# EAGLE board Teensy-MicroMod-Panel (EAGLE 9.5.2), part 1 of 10
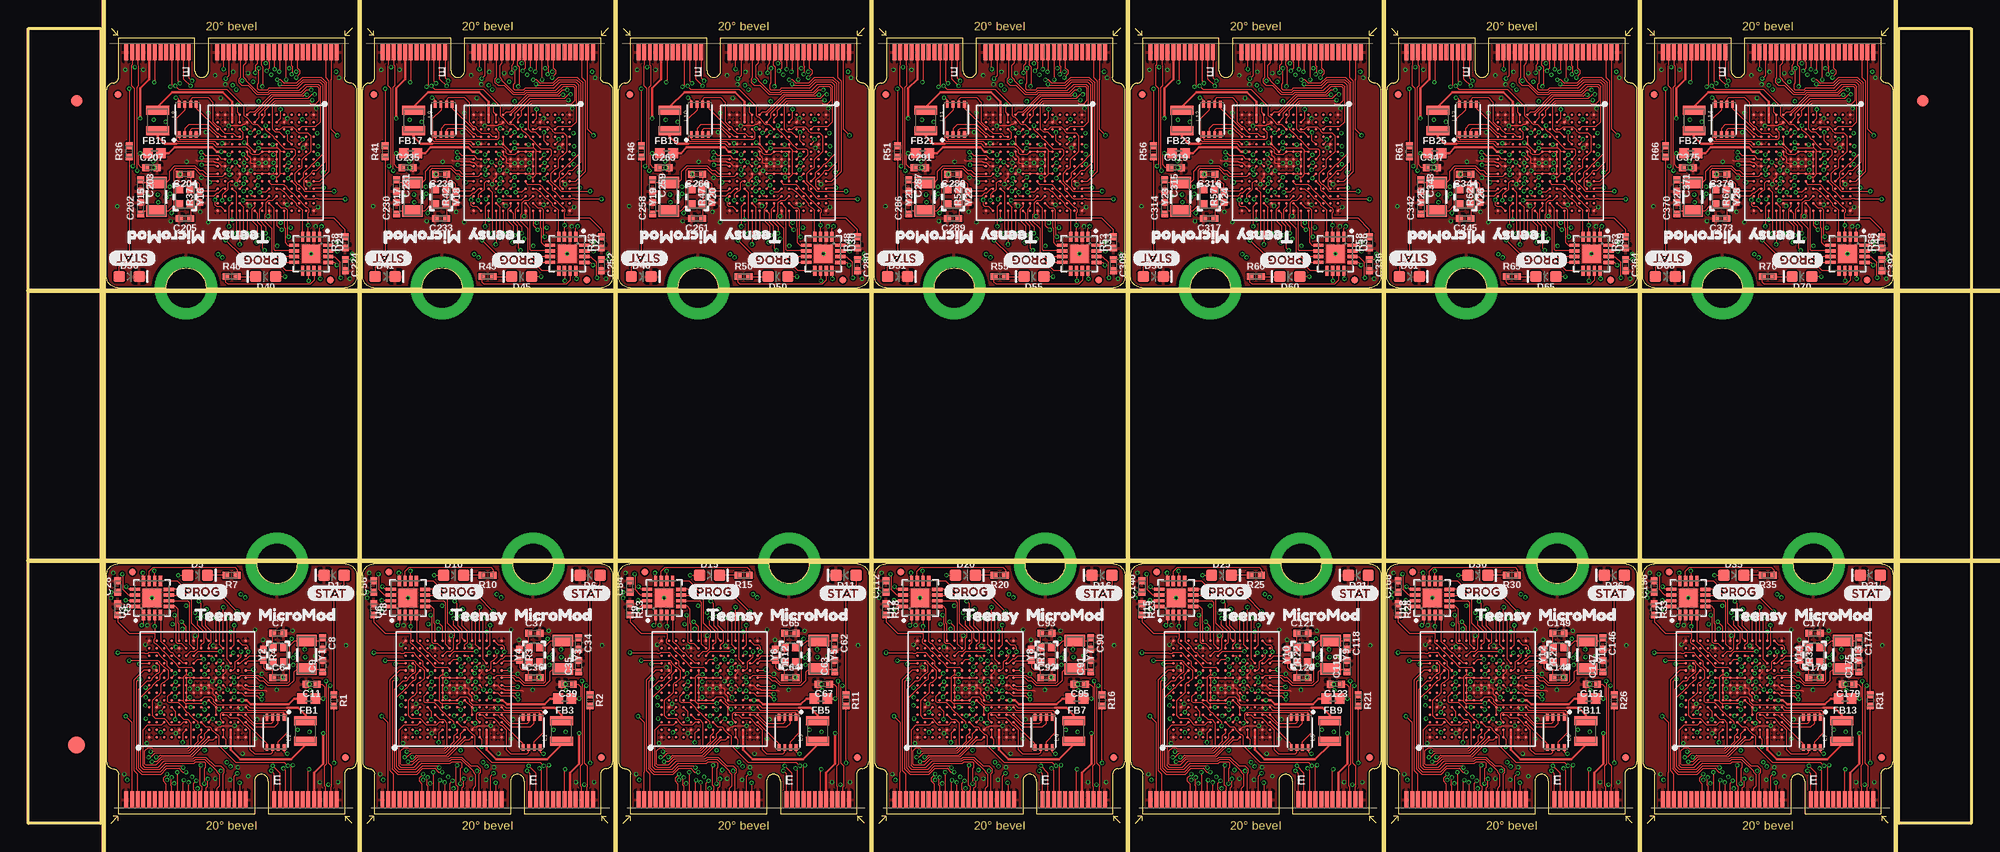
[diagram p0: board, top side]
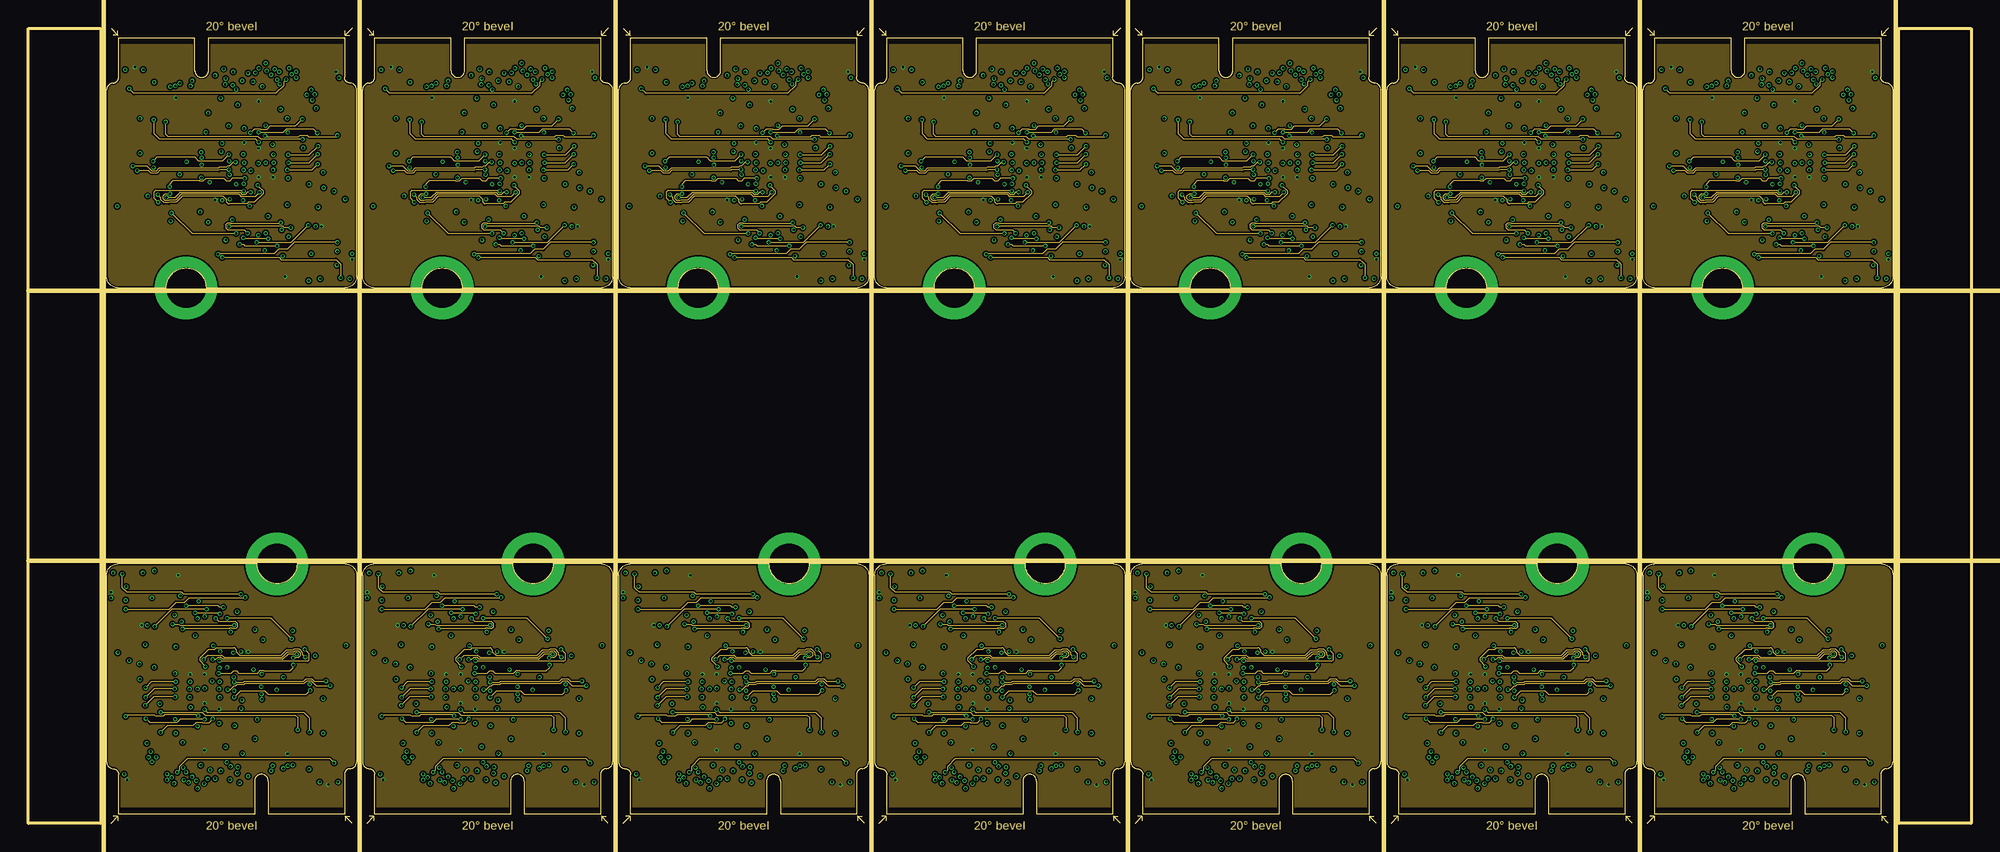
[diagram p1: board, inner layer Route2]
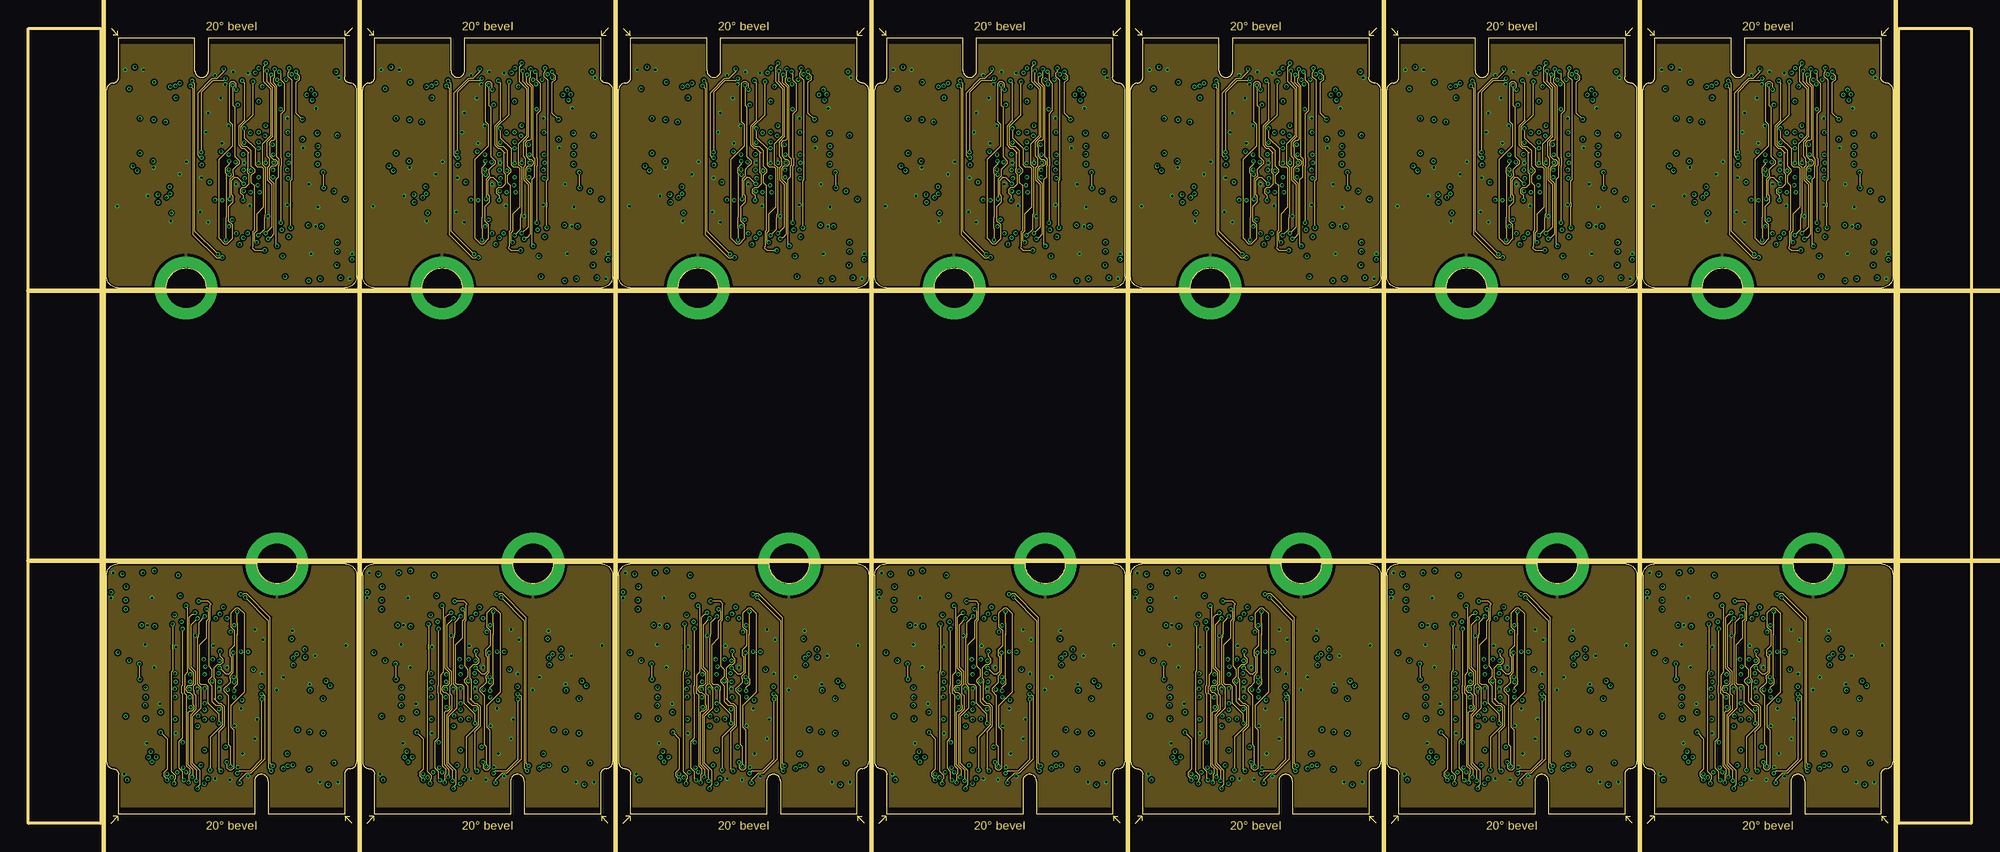
[diagram p2: board, inner layer Route15]
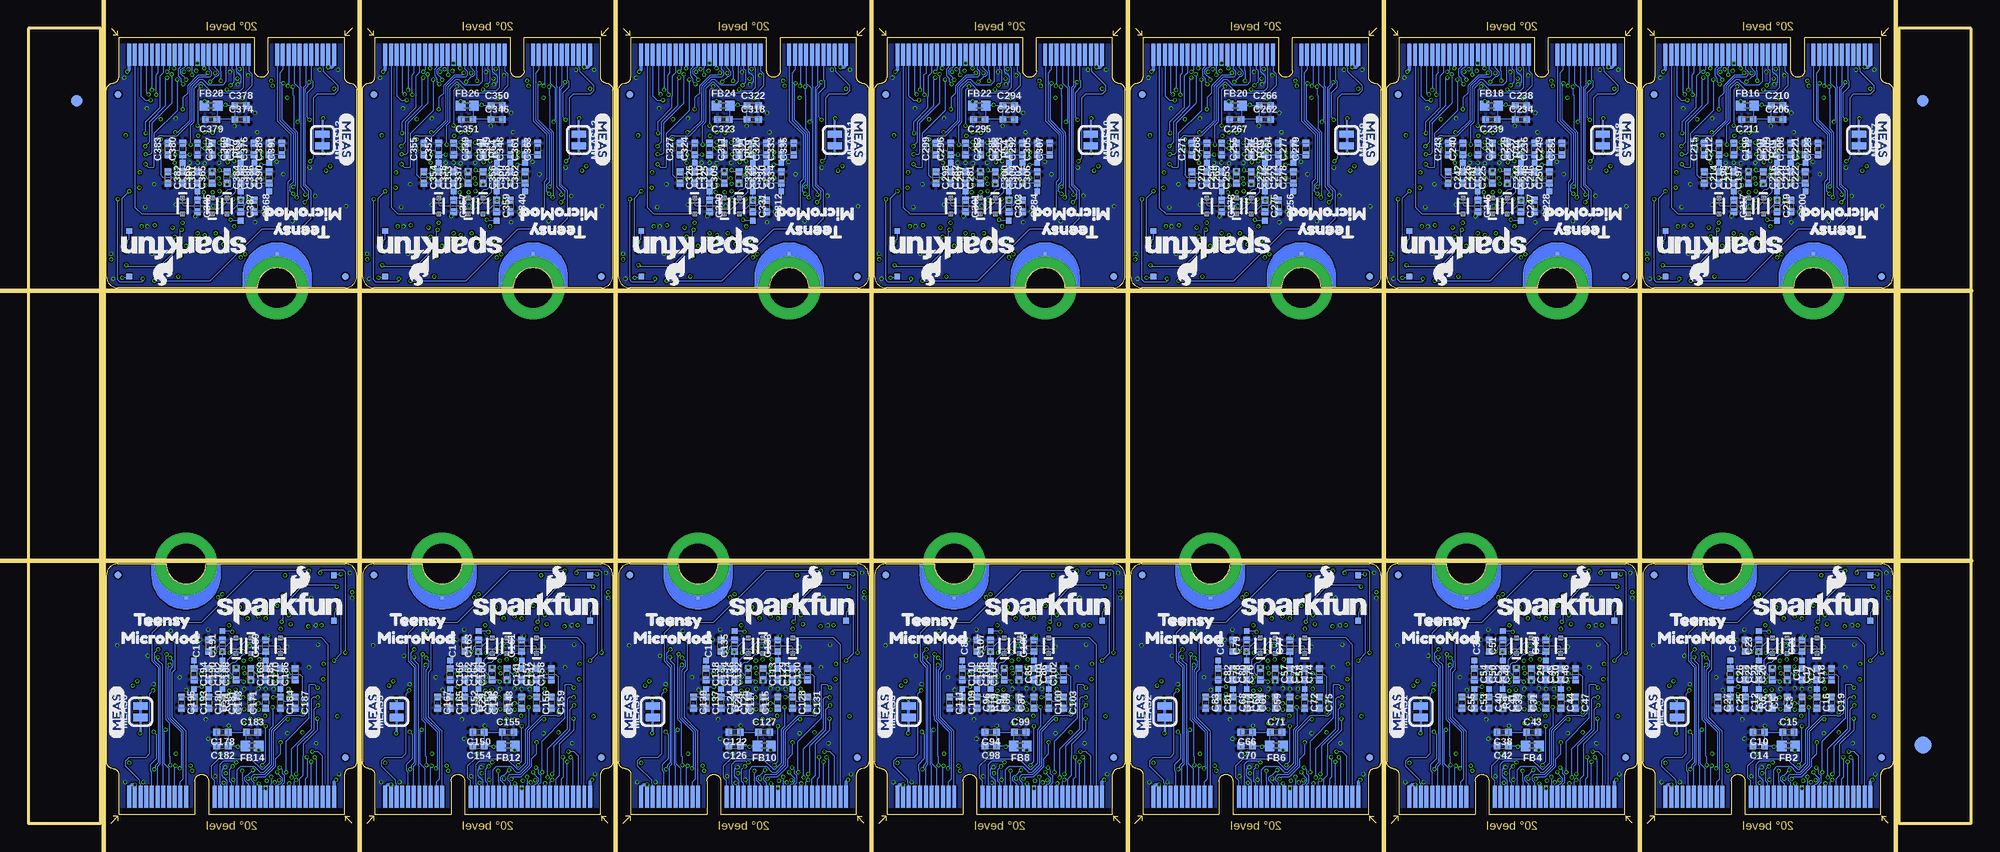
[diagram p3: board, bottom side, seen from below]

Size 170.76 x 69.85 mm. Coordinates in mm from the lower left corner, seen from the top.
Outline: 28.46,0 27.86,0.6
Outline: 27.86,0.6 27.86,0.2
Outline: 27.86,0.6 28.26,0.6
Outline: 7.26,0 7.86,0.6
Outline: 7.86,0.6 7.46,0.6
Outline: 7.86,0.6 7.86,0.2
Outline: 23.61,22.8 27.86,22.8 arc-87 28.86,21.8 28.86,5.4 arc-87 28.26,4.8 arc85 27.78,4.3 27.78,0.8 21.08,0.8 21.08,3.7 arc180 19.88,3.7 19.88,0.8 7.93,0.8 7.93,4.3 arc84 7.46,4.8 arc-87 6.86,5.4 6.86,21.8 arc-87 7.86,22.8 20.11,22.8
Outline: 23.61,22.8 arc-180 20.11,22.8
Outline: 23.61,22.8 arc-180 20.11,22.8
Outline: 50.96,0 50.36,0.6
Outline: 50.36,0.6 50.36,0.2
Outline: 50.36,0.6 50.76,0.6
Outline: 29.77,0 30.37,0.6
Outline: 30.37,0.6 29.96,0.6
Outline: 30.37,0.6 30.37,0.2
Outline: 46.11,22.8 50.36,22.8 arc-87 51.36,21.8 51.36,5.4 arc-87 50.76,4.8 arc85 50.29,4.3 50.29,0.8 43.59,0.8 43.59,3.7 arc180 42.39,3.7 42.39,0.8 30.44,0.8 30.44,4.3 arc84 29.96,4.8 arc-87 29.37,5.4 29.37,21.8 arc-87 30.37,22.8 42.61,22.8
Outline: 46.11,22.8 arc-180 42.61,22.8
Outline: 46.11,22.8 arc-180 42.61,22.8
Outline: 73.47,0 72.87,0.6
Outline: 72.87,0.6 72.87,0.2
Outline: 72.87,0.6 73.27,0.6
Outline: 52.27,0 52.87,0.6
Outline: 52.87,0.6 52.47,0.6
Outline: 52.87,0.6 52.87,0.2
Outline: 68.62,22.8 72.87,22.8 arc-87 73.87,21.8 73.87,5.4 arc-87 73.27,4.8 arc85 72.8,4.3 72.8,0.8 66.1,0.8 66.1,3.7 arc180 64.9,3.7 64.9,0.8 52.95,0.8 52.95,4.3 arc84 52.47,4.8 arc-87 51.87,5.4 51.87,21.8 arc-87 52.87,22.8 65.12,22.8
Outline: 68.62,22.8 arc-180 65.12,22.8
Outline: 68.62,22.8 arc-180 65.12,22.8
Outline: 95.98,0 95.38,0.6
Outline: 95.38,0.6 95.38,0.2
Outline: 95.38,0.6 95.78,0.6
Outline: 74.78,0 75.38,0.6
Outline: 75.38,0.6 74.98,0.6
Outline: 75.38,0.6 75.38,0.2
Outline: 91.13,22.8 95.38,22.8 arc-87 96.38,21.8 96.38,5.4 arc-87 95.78,4.8 arc85 95.31,4.3 95.31,0.8 88.61,0.8 88.61,3.7 arc180 87.41,3.7 87.41,0.8 75.46,0.8 75.46,4.3 arc84 74.98,4.8 arc-87 74.38,5.4 74.38,21.8 arc-87 75.38,22.8 87.63,22.8
Outline: 91.13,22.8 arc-180 87.63,22.8
Outline: 91.13,22.8 arc-180 87.63,22.8
Outline: 118.49,0 117.89,0.6
Outline: 117.89,0.6 117.89,0.2
Outline: 117.89,0.6 118.29,0.6
Outline: 97.29,0 97.89,0.6
Outline: 97.89,0.6 97.49,0.6
Outline: 97.89,0.6 97.89,0.2
Outline: 113.64,22.8 117.89,22.8 arc-87 118.89,21.8 118.89,5.4 arc-87 118.29,4.8 arc85 117.82,4.3 117.82,0.8 111.12,0.8 111.12,3.7 arc180 109.92,3.7 109.92,0.8 97.97,0.8 97.97,4.3 arc84 97.49,4.8 arc-87 96.89,5.4 96.89,21.8 arc-87 97.89,22.8 110.14,22.8
Outline: 113.64,22.8 arc-180 110.14,22.8
Outline: 113.64,22.8 arc-180 110.14,22.8
Outline: 141,0 140.4,0.6
Outline: 140.4,0.6 140.4,0.2
Outline: 140.4,0.6 140.8,0.6
Outline: 119.8,0 120.4,0.6
Outline: 120.4,0.6 120,0.6
Outline: 120.4,0.6 120.4,0.2
Outline: 136.15,22.8 140.4,22.8 arc-87 141.4,21.8 141.4,5.4 arc-87 140.8,4.8 arc85 140.32,4.3 140.32,0.8 133.62,0.8 133.62,3.7 arc180 132.42,3.7 132.42,0.8 120.47,0.8 120.47,4.3 arc84 120,4.8 arc-87 119.4,5.4 119.4,21.8 arc-87 120.4,22.8 132.65,22.8
Outline: 136.15,22.8 arc-180 132.65,22.8
Outline: 136.15,22.8 arc-180 132.65,22.8
Outline: 163.51,0 162.91,0.6
Outline: 162.91,0.6 162.91,0.2
Outline: 162.91,0.6 163.31,0.6
Outline: 142.31,0 142.91,0.6
Outline: 142.91,0.6 142.51,0.6
Outline: 142.91,0.6 142.91,0.2
Outline: 158.66,22.8 162.91,22.8 arc-87 163.91,21.8 163.91,5.4 arc-87 163.31,4.8 arc85 162.83,4.3 162.83,0.8 156.13,0.8 156.13,3.7 arc180 154.93,3.7 154.93,0.8 142.98,0.8 142.98,4.3 arc84 142.51,4.8 arc-87 141.91,5.4 141.91,21.8 arc-87 142.91,22.8 155.16,22.8
Outline: 158.66,22.8 arc-180 155.16,22.8
Outline: 158.66,22.8 arc-180 155.16,22.8
Outline: 7.26,69.85 7.86,69.25
Outline: 7.86,69.25 7.86,69.65
Outline: 7.86,69.25 7.46,69.25
Outline: 28.46,69.85 27.86,69.25
Outline: 27.86,69.25 28.26,69.25
Outline: 27.86,69.25 27.86,69.65
Outline: 12.11,47.05 7.86,47.05 arc-87 6.86,48.05 6.86,64.45 arc-87 7.46,65.05 arc85 7.93,65.55 7.93,69.05 14.63,69.05 14.63,66.15 arc180 15.83,66.15 15.83,69.05 27.78,69.05 27.78,65.55 arc84 28.26,65.05 arc-87 28.86,64.45 28.86,48.05 arc-87 27.86,47.05 15.61,47.05
Outline: 12.11,47.05 arc-180 15.61,47.05
Outline: 12.11,47.05 arc-180 15.61,47.05
Outline: 29.77,69.85 30.37,69.25
Outline: 30.37,69.25 30.37,69.65
Outline: 30.37,69.25 29.97,69.25
Outline: 50.97,69.85 50.37,69.25
Outline: 50.37,69.25 50.77,69.25
Outline: 50.37,69.25 50.37,69.65
Outline: 34.62,47.05 30.37,47.05 arc-87 29.37,48.05 29.37,64.45 arc-87 29.97,65.05 arc85 30.44,65.55 30.44,69.05 37.14,69.05 37.14,66.15 arc180 38.34,66.15 38.34,69.05 50.29,69.05 50.29,65.55 arc84 50.77,65.05 arc-87 51.37,64.45 51.37,48.05 arc-87 50.37,47.05 38.12,47.05
Outline: 34.62,47.05 arc-180 38.12,47.05
Outline: 34.62,47.05 arc-180 38.12,47.05
Outline: 52.27,69.85 52.87,69.25
Outline: 52.87,69.25 52.87,69.65
Outline: 52.87,69.25 52.47,69.25
Outline: 73.47,69.85 72.87,69.25
Outline: 72.87,69.25 73.27,69.25
Outline: 72.87,69.25 72.87,69.65
Outline: 57.12,47.05 52.87,47.05 arc-87 51.87,48.05 51.87,64.45 arc-87 52.47,65.05 arc85 52.95,65.55 52.95,69.05 59.65,69.05 59.65,66.15 arc180 60.85,66.15 60.85,69.05 72.8,69.05 72.8,65.55 arc84 73.27,65.05 arc-87 73.87,64.45 73.87,48.05 arc-87 72.87,47.05 60.62,47.05
Outline: 57.12,47.05 arc-180 60.62,47.05
Outline: 57.12,47.05 arc-180 60.62,47.05
Outline: 74.78,69.85 75.38,69.25
Outline: 75.38,69.25 75.38,69.65
Outline: 75.38,69.25 74.98,69.25
Outline: 95.98,69.85 95.38,69.25
Outline: 95.38,69.25 95.78,69.25
Outline: 95.38,69.25 95.38,69.65
Outline: 79.63,47.05 75.38,47.05 arc-87 74.38,48.05 74.38,64.45 arc-87 74.98,65.05 arc85 75.46,65.55 75.46,69.05 82.16,69.05 82.16,66.15 arc180 83.36,66.15 83.36,69.05 95.31,69.05 95.31,65.55 arc84 95.78,65.05 arc-87 96.38,64.45 96.38,48.05 arc-87 95.38,47.05 83.13,47.05
Outline: 79.63,47.05 arc-180 83.13,47.05
Outline: 79.63,47.05 arc-180 83.13,47.05
Outline: 97.29,69.85 97.89,69.25
Outline: 97.89,69.25 97.89,69.65
Outline: 97.89,69.25 97.49,69.25
Outline: 118.49,69.85 117.89,69.25
Outline: 117.89,69.25 118.29,69.25
Outline: 117.89,69.25 117.89,69.65
Outline: 102.14,47.05 97.89,47.05 arc-87 96.89,48.05 96.89,64.45 arc-87 97.49,65.05 arc85 97.97,65.55 97.97,69.05 104.67,69.05 104.67,66.15 arc180 105.87,66.15 105.87,69.05 117.81,69.05 117.81,65.55 arc84 118.29,65.05 arc-87 118.89,64.45 118.89,48.05 arc-87 117.89,47.05 105.64,47.05
Outline: 102.14,47.05 arc-180 105.64,47.05
Outline: 102.14,47.05 arc-180 105.64,47.05
Outline: 119.8,69.85 120.4,69.25
Outline: 120.4,69.25 120.4,69.65
Outline: 120.4,69.25 120,69.25
Outline: 141,69.85 140.4,69.25
Outline: 140.4,69.25 140.8,69.25
Outline: 140.4,69.25 140.4,69.65
Outline: 124.65,47.05 120.4,47.05 arc-87 119.4,48.05 119.4,64.45 arc-87 120,65.05 arc85 120.47,65.55 120.47,69.05 127.17,69.05 127.17,66.15 arc180 128.37,66.15 128.37,69.05 140.32,69.05 140.32,65.55 arc84 140.8,65.05 arc-87 141.4,64.45 141.4,48.05 arc-87 140.4,47.05 128.15,47.05
Outline: 124.65,47.05 arc-180 128.15,47.05
Outline: 124.65,47.05 arc-180 128.15,47.05
Outline: 142.31,69.85 142.91,69.25
Outline: 142.91,69.25 142.91,69.65
Outline: 142.91,69.25 142.51,69.25
Outline: 163.51,69.85 162.91,69.25
Outline: 162.91,69.25 163.31,69.25
Outline: 162.91,69.25 162.91,69.65
Outline: 147.16,47.05 142.91,47.05 arc-87 141.91,48.05 141.91,64.45 arc-87 142.51,65.05 arc85 142.98,65.55 142.98,69.05 149.68,69.05 149.68,66.15 arc180 150.88,66.15 150.88,69.05 162.83,69.05 162.83,65.55 arc84 163.31,65.05 arc-87 163.91,64.45 163.91,48.05 arc-87 162.91,47.05 150.66,47.05
Outline: 147.16,47.05 arc-180 150.66,47.05
Outline: 147.16,47.05 arc-180 150.66,47.05
Outline: 164.41,69.85 170.76,69.85 170.76,0 164.41,0 164.41,69.85
Outline: 0,69.85 6.35,69.85 6.35,0 0,0 0,69.85
Copper layers (1+2*15+16): Top 0.035mm / dielectric 0.213359375mm / Route2 0.035mm / dielectric 1.0161mm / Route15 0.035mm / dielectric 0.213359375mm / Bottom 0.035mm
Design rules "Teensy-MicroMod": minimum track width 3.5mil, minimum drill 0.2mm, track to track 3.5mil, track to pad 3.5mil, pad to pad 3.5mil, via to via 3.5mil, smd to smd 0mil, copper to edge 4mil, drill to drill 4mil, minimum pad ring 3mil, minimum via ring 3mil, stop-mask expansion 4mil, vias tented up to drill 25mil, thermal gap 10mil
Milling: 10 lines

## Footprints (pad centres in the part's own frame; a part is rotated, then mirrored left to right if it is on the bottom)
0402-TIGHT = smd 0.6 x 0.6: 1 -0.5,0; 2 0.5,0
LED-0603 = smd 1 x 1: A -0.877,0; C 0.877,0
SOD-523 = smd 0.4 x 0.4: A -0.7,0; C 0.7,0
FIDUCIAL-1X2 = smd 1 x 1: 1 0,0
FIDUCIAL-1.5X3 = smd 1.5 x 1.5: 1 0,0
0402 = smd 0.85 x 0.9: 1 -0.58,0; 2 0.58,0
FIDUCIAL-MICRO = smd 0.635 x 0.635: 1 0,0
M.2-CARD-E-22 = smd 0.35 x 1.45: 1 9.25,1.275; 3 8.75,1.275; 5 8.25,1.275; 7 7.75,1.275; 9 7.25,1.275; 11 6.75,1.275; 13 6.25,1.275; 15 5.75,1.275; 17 5.25,1.275; 19 4.75,1.275; 21 4.25,1.275; 23 3.75,1.275; 33 1.25,1.275; 35 0.75,1.275; 37 0.25,1.275; 39 -0.25,1.275; 41 -0.75,1.275; 43 -1.25,1.275; 45 -1.75,1.275; 47 -2.25,1.275; 49 -2.75,1.275; 51 -3.25,1.275; 53 -3.75,1.275; 55 -4.25,1.275; 57 -4.75,1.275; 59 -5.25,1.275; 61 -5.75,1.275; 63 -6.25,1.275; 65 -6.75,1.275; 67 -7.25,1.275; 69 -7.75,1.275; 71 -8.25,1.275; 73 -8.75,1.275; 75 -9.25,1.275 | smd 0.35 x 1.95 bottom: 2 9,1.525; 4 8.5,1.525; 6 8,1.525; 8 7.5,1.525; 10 7,1.525; 12 6.5,1.525; 14 6,1.525; 16 5.5,1.525; 18 5,1.525; 20 4.5,1.525; 22 4,1.525; 32 1.5,1.525; 34 1,1.525; 36 0.5,1.525; 38 0,1.525; 40 -0.5,1.525; 42 -1,1.525; 44 -1.5,1.525; 46 -2,1.525; 48 -2.5,1.525; 50 -3,1.525; 52 -3.5,1.525; 54 -4,1.525; 56 -4.5,1.525; 58 -5,1.525; 60 -5.5,1.525; 62 -6,1.525; 64 -6.5,1.525; 66 -7,1.525; 68 -7.5,1.525; 70 -8,1.525; 72 -8.5,1.525; 74 -9,1.525 | drill 3.5 pad 5.5: GND 4,22 | smd 0.25 x 0.25 bottom: GND-SM-B 4,19
1008(2520) = smd 0.8 x 2: 1 -0.9,0; 2 0.9,0
SMT-JUMPER_2_NC_TRACE_SILK = smd 0.635 x 1.27: 1 -0.508,0; 2 0.508,0
PAD.02X.02 = smd 0.508 x 0.508: P$1 0,0
IMXRT1062 = smd 0.234 x 0.234: A1 -4.225,4.225; A2 -3.575,4.225; A3 -2.925,4.225; A4 -2.275,4.225; A5 -1.625,4.225; A6 -0.975,4.225; A7 -0.325,4.225; A8 0.325,4.225; A9 0.975,4.225; A10 1.625,4.225; A11 2.275,4.225; A12 2.925,4.225; A13 3.575,4.225; A14 4.225,4.225; B1 -4.225,3.575; B2 -3.575,3.575; B3 -2.925,3.575; B4 -2.275,3.575; B5 -1.625,3.575; B6 -0.975,3.575; B7 -0.325,3.575; B8 0.325,3.575; B9 0.975,3.575; B10 1.625,3.575; B11 2.275,3.575; B12 2.925,3.575; B13 3.575,3.575; B14 4.225,3.575; C1 -4.225,2.925; C2 -3.575,2.925; C3 -2.925,2.925; C4 -2.275,2.925; C5 -1.625,2.925; C6 -0.975,2.925; C7 -0.325,2.925; C8 0.325,2.925; C9 0.975,2.925; C10 1.625,2.925; C11 2.275,2.925; C12 2.925,2.925; C13 3.575,2.925; C14 4.225,2.925; D1 -4.225,2.275; D2 -3.575,2.275; D3 -2.925,2.275; D4 -2.275,2.275; D5 -1.625,2.275; D6 -0.975,2.275; D7 -0.325,2.275; D8 0.325,2.275; D9 0.975,2.275; D10 1.625,2.275; D11 2.275,2.275; D12 2.925,2.275; D13 3.575,2.275; D14 4.225,2.275; E1 -4.225,1.625; E2 -3.575,1.625; E3 -2.925,1.625; E4 -2.275,1.625; E5 -1.625,1.625; E6 -0.975,1.625; E7 -0.325,1.625; E8 0.325,1.625; E9 0.975,1.625; E10 1.625,1.625; E11 2.275,1.625; E12 2.925,1.625; E13 3.575,1.625; E14 4.225,1.625; F1 -4.225,0.975; F2 -3.575,0.975; F3 -2.925,0.975; F4 -2.275,0.975; F5 -1.625,0.975; F6 -0.975,0.975; F7 -0.325,0.975; F8 0.325,0.975; F9 0.975,0.975; F10 1.625,0.975; F11 2.275,0.975; F12 2.925,0.975; F13 3.575,0.975; F14 4.225,0.975; G1 -4.225,0.325; G2 -3.575,0.325; G3 -2.925,0.325; G4 -2.275,0.325; G5 -1.625,0.325; G6 -0.975,0.325; G7 -0.325,0.325; G8 0.325,0.325; G9 0.975,0.325; G10 1.625,0.325; G11 2.275,0.325; G12 2.925,0.325; G13 3.575,0.325; G14 4.225,0.325; H1 -4.225,-0.325; H2 -3.575,-0.325; H3 -2.925,-0.325; H4 -2.275,-0.325; H5 -1.625,-0.325; H6 -0.975,-0.325; H7 -0.325,-0.325; H8 0.325,-0.325; H9 0.975,-0.325; H10 1.625,-0.325; H11 2.275,-0.325; H12 2.925,-0.325; H13 3.575,-0.325; H14 4.225,-0.325; J1 -4.225,-0.975; J2 -3.575,-0.975; J3 -2.925,-0.975; J4 -2.275,-0.975; J5 -1.625,-0.975; J6 -0.975,-0.975; J7 -0.325,-0.975; J8 0.325,-0.975; J9 0.975,-0.975; J10 1.625,-0.975; J11 2.275,-0.975; J12 2.925,-0.975; J13 3.575,-0.975; J14 4.225,-0.975; K1 -4.225,-1.625; K2 -3.575,-1.625; K3 -2.925,-1.625; K4 -2.275,-1.625; K5 -1.625,-1.625; K6 -0.975,-1.625; K7 -0.325,-1.625; K8 0.325,-1.625; K9 0.975,-1.625; K10 1.625,-1.625; K11 2.275,-1.625; K12 2.925,-1.625; K13 3.575,-1.625; K14 4.225,-1.625; L1 -4.225,-2.275; L2 -3.575,-2.275; L3 -2.925,-2.275; L4 -2.275,-2.275; L5 -1.625,-2.275; L6 -0.975,-2.275; L7 -0.325,-2.275; L8 0.325,-2.275; L9 0.975,-2.275; L10 1.625,-2.275; L11 2.275,-2.275; L12 2.925,-2.275; L13 3.575,-2.275; L14 4.225,-2.275; M1 -4.225,-2.925; M2 -3.575,-2.925; M3 -2.925,-2.925; M4 -2.275,-2.925; M5 -1.625,-2.925; M6 -0.975,-2.925; M7 -0.325,-2.925; M8 0.325,-2.925; M9 0.975,-2.925; M10 1.625,-2.925; M11 2.275,-2.925; M12 2.925,-2.925; M13 3.575,-2.925; M14 4.225,-2.925; N1 -4.225,-3.575; N2 -3.575,-3.575; N3 -2.925,-3.575; N4 -2.275,-3.575; N5 -1.625,-3.575; N6 -0.975,-3.575; N7 -0.325,-3.575; N8 0.325,-3.575; N9 0.975,-3.575; N10 1.625,-3.575; N11 2.275,-3.575; N12 2.925,-3.575; N13 3.575,-3.575; N14 4.225,-3.575; P1 -4.225,-4.225; P2 -3.575,-4.225; P3 -2.925,-4.225; P4 -2.275,-4.225; P5 -1.625,-4.225; P6 -0.975,-4.225; P7 -0.325,-4.225; P8 0.325,-4.225; P9 0.975,-4.225; P10 1.625,-4.225; P11 2.275,-4.225; P12 2.925,-4.225; P13 3.575,-4.225; P14 4.225,-4.225
USON-8 = smd 0.6 x 0.25: 1 -1.325,0.75; 2 -1.325,0.25; 3 -1.325,-0.25; 4 -1.325,-0.75; 5 1.325,-0.75; 6 1.325,-0.25; 7 1.325,0.25; 8 1.325,0.75
QFN-16 = smd 0.9 x 0.29: 1 -1.5,0.75; 2 -1.5,0.25; 3 -1.5,-0.25; 4 -1.5,-0.75; 9 1.5,-0.75; 10 1.5,-0.25; 11 1.5,0.25; 12 1.5,0.75 | smd 0.29 x 0.9: 5 -0.75,-1.5; 6 -0.25,-1.5; 7 0.25,-1.5; 8 0.75,-1.5; 13 0.765,1.5; 14 0.25,1.5; 15 -0.25,1.5; 16 -0.75,1.5 | smd 1.6 x 1.6: 17 0,0
CRYSTAL-SMD-3.2X1.5MM = smd 1 x 1.8: P$1 -1.25,0; P$2 1.25,0
CRYSTAL-SMD-2.0X1.6MM = smd 0.75 x 0.7: 1 -0.675,-0.5; 2 0.675,-0.5; 3 0.675,0.5; 4 -0.675,0.5